# EAGLE board Thing_Plus_Qwiic_Shield-Panel (EAGLE 9.1.0)
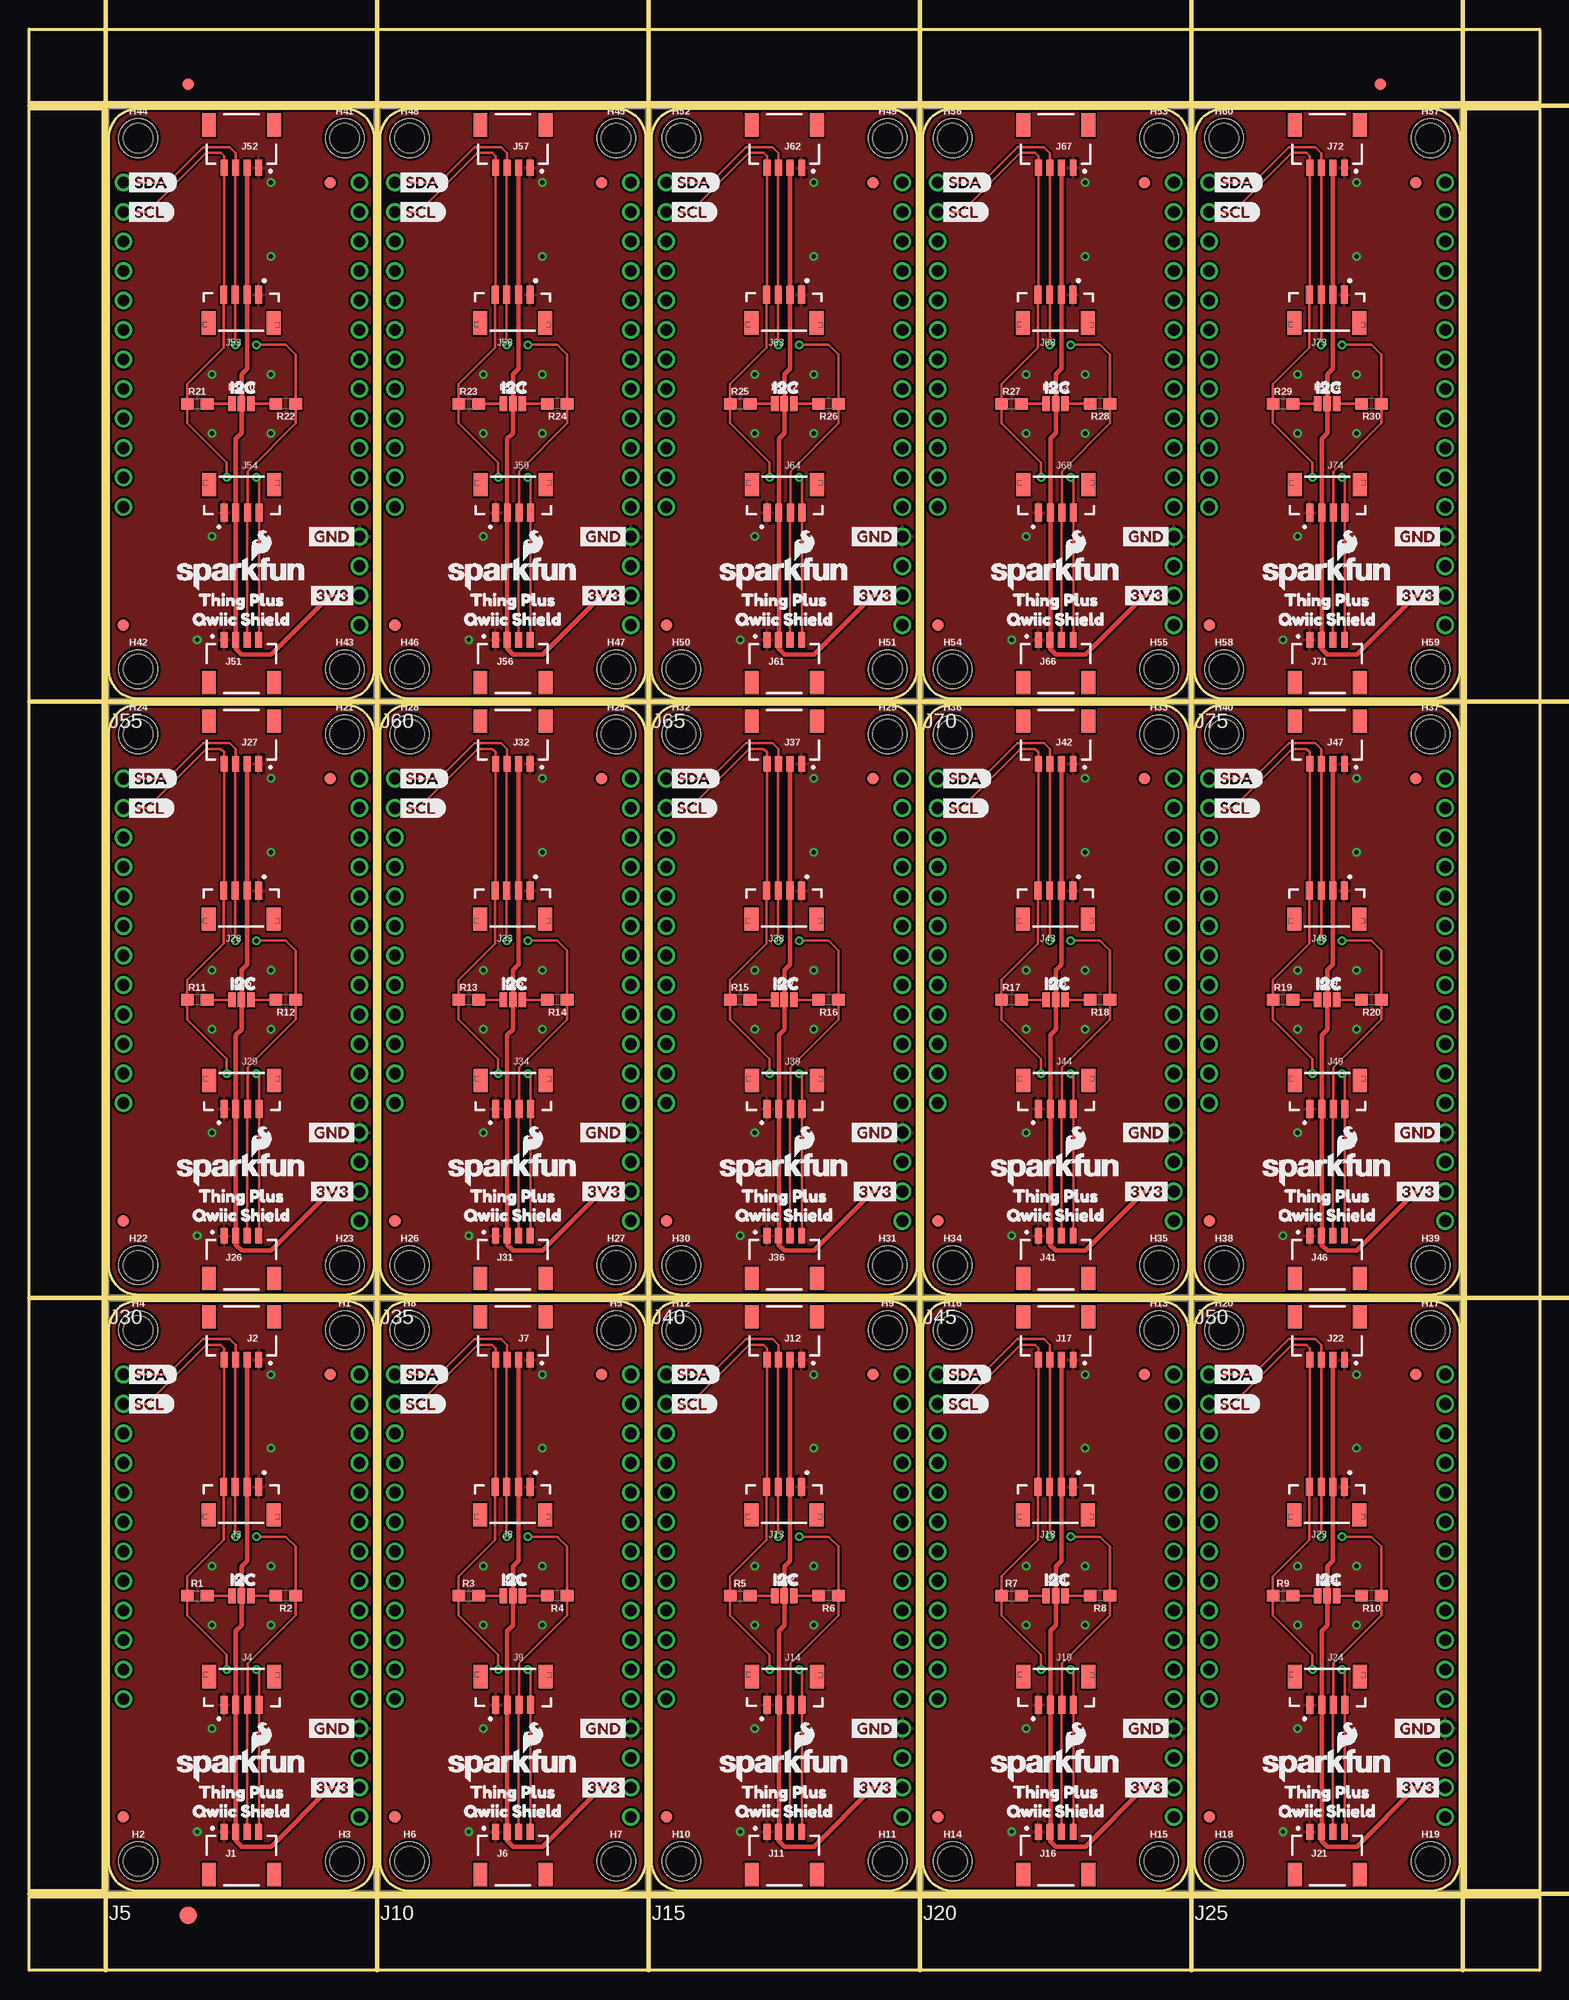
[diagram p0: board, top side]
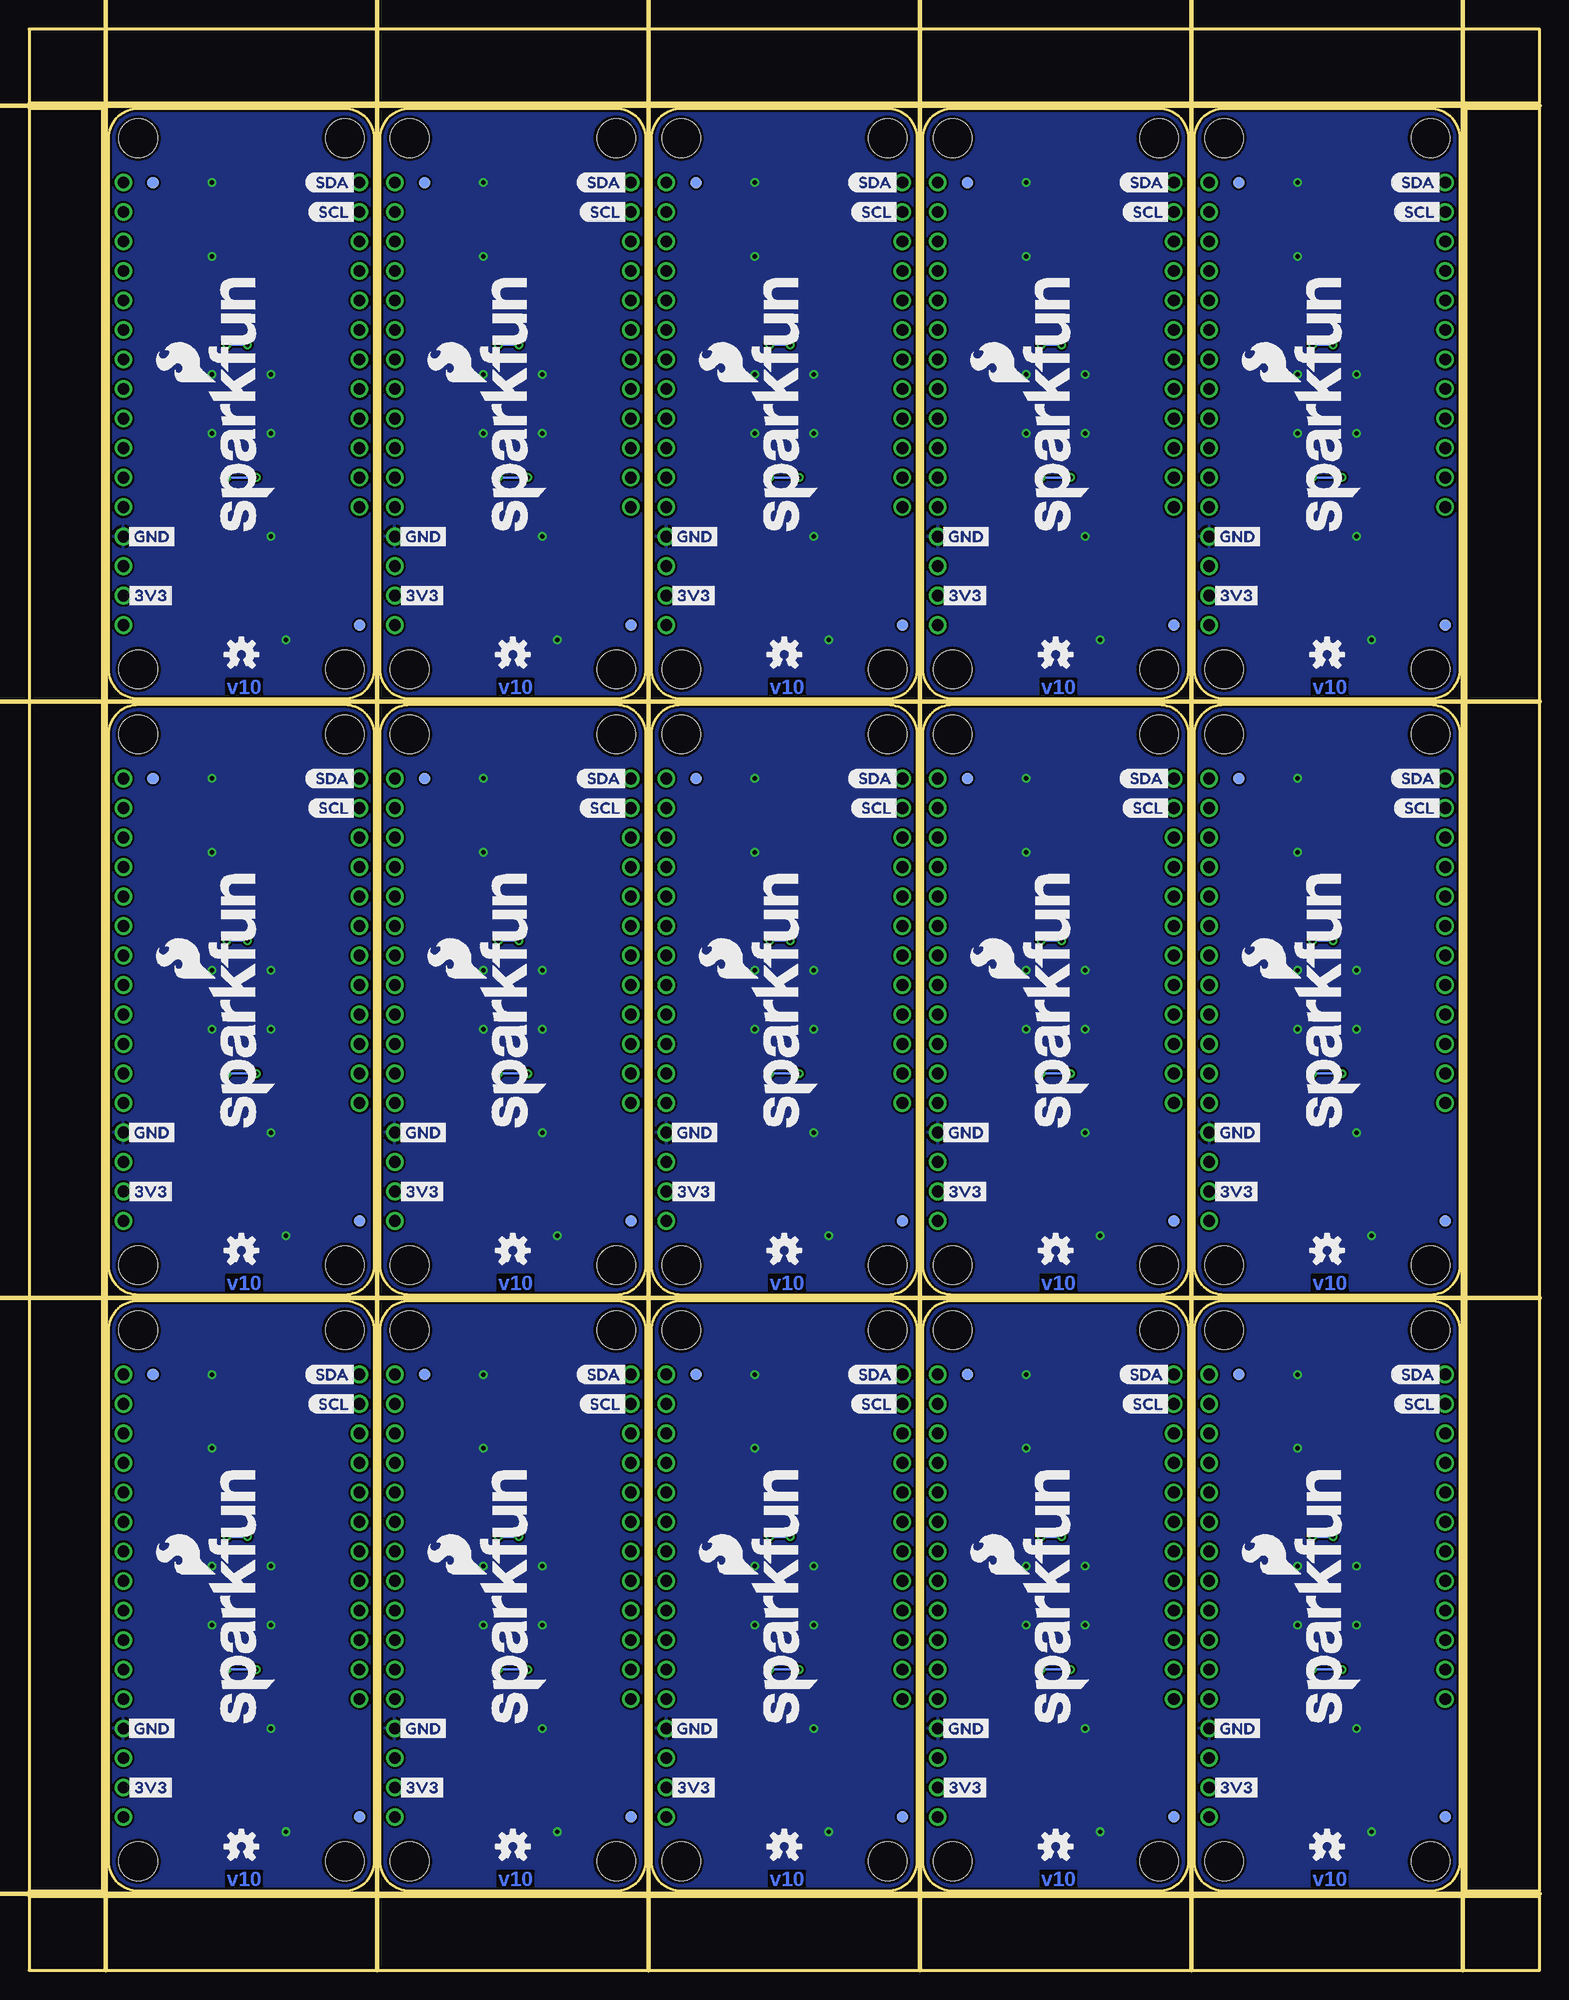
[diagram p1: board, bottom side, seen from below]

Size 130.05 x 167.13 mm. Coordinates in mm from the lower left corner, seen from the top.
Outline: 6.86,9.4 6.86,55.12 arc-90 9.4,57.66 27.18,57.66 arc-90 29.72,55.12 29.72,9.4 arc-90 27.18,6.86 9.4,6.86 arc-90 6.86,9.4
Outline: 30.23,9.4 30.23,55.12 arc-90 32.77,57.66 50.55,57.66 arc-90 53.09,55.12 53.09,9.4 arc-90 50.55,6.86 32.77,6.86 arc-90 30.23,9.4
Outline: 53.59,9.4 53.59,55.12 arc-90 56.13,57.66 73.91,57.66 arc-90 76.45,55.12 76.45,9.4 arc-90 73.91,6.86 56.13,6.86 arc-90 53.59,9.4
Outline: 76.96,9.4 76.96,55.12 arc-90 79.5,57.66 97.28,57.66 arc-90 99.82,55.12 99.82,9.4 arc-90 97.28,6.86 79.5,6.86 arc-90 76.96,9.4
Outline: 100.33,9.4 100.33,55.12 arc-90 102.87,57.66 120.65,57.66 arc-90 123.19,55.12 123.19,9.4 arc-90 120.65,6.86 102.87,6.86 arc-90 100.33,9.4
Outline: 6.86,60.71 6.86,106.43 arc-90 9.4,108.97 27.18,108.97 arc-90 29.72,106.43 29.72,60.71 arc-90 27.18,58.17 9.4,58.17 arc-90 6.86,60.71
Outline: 30.23,60.71 30.23,106.43 arc-90 32.77,108.97 50.55,108.97 arc-90 53.09,106.43 53.09,60.71 arc-90 50.55,58.17 32.77,58.17 arc-90 30.23,60.71
Outline: 53.59,60.71 53.59,106.43 arc-90 56.13,108.97 73.91,108.97 arc-90 76.45,106.43 76.45,60.71 arc-90 73.91,58.17 56.13,58.17 arc-90 53.59,60.71
Outline: 76.96,60.71 76.96,106.43 arc-90 79.5,108.97 97.28,108.97 arc-90 99.82,106.43 99.82,60.71 arc-90 97.28,58.17 79.5,58.17 arc-90 76.96,60.71
Outline: 100.33,60.71 100.33,106.43 arc-90 102.87,108.97 120.65,108.97 arc-90 123.19,106.43 123.19,60.71 arc-90 120.65,58.17 102.87,58.17 arc-90 100.33,60.71
Outline: 6.86,112.01 6.86,157.73 arc-90 9.4,160.27 27.18,160.27 arc-90 29.72,157.73 29.72,112.01 arc-90 27.18,109.47 9.4,109.47 arc-90 6.86,112.01
Outline: 30.23,112.01 30.23,157.73 arc-90 32.77,160.27 50.55,160.27 arc-90 53.09,157.73 53.09,112.01 arc-90 50.55,109.47 32.77,109.47 arc-90 30.23,112.01
Outline: 53.59,112.01 53.59,157.73 arc-90 56.13,160.27 73.91,160.27 arc-90 76.45,157.73 76.45,112.01 arc-90 73.91,109.47 56.13,109.47 arc-90 53.59,112.01
Outline: 76.96,112.01 76.96,157.73 arc-90 79.5,160.27 97.28,160.27 arc-90 99.82,157.73 99.82,112.01 arc-90 97.28,109.47 79.5,109.47 arc-90 76.96,112.01
Outline: 100.33,112.01 100.33,157.73 arc-90 102.87,160.27 120.65,160.27 arc-90 123.19,157.73 123.19,112.01 arc-90 120.65,109.47 102.87,109.47 arc-90 100.33,112.01
Outline: 0,6.35 130.05,6.35 130.05,0 0,0 0,6.35
Outline: 123.7,160.27 130.05,160.27 130.05,6.86 123.7,6.86 123.7,160.27
Outline: 0,167.13 130.05,167.13 130.05,160.78 0,160.78 0,167.13
Outline: 0,160.27 6.35,160.27 6.35,6.86 0,6.86 0,160.27
Copper layers (1*16): Top 0.035mm / dielectric 1.5mm / Bottom 0.035mm
Design rules "SparkFun-2-layer-TIGHT": minimum track width 7mil, minimum drill 15mil, track to track 7mil, track to pad 7mil, pad to pad 7mil, via to via 7mil, smd to smd 7mil, copper to edge 7mil, drill to drill 7mil, minimum pad ring 7mil, minimum via ring 7mil, stop-mask expansion 4mil, vias tented up to drill 25mil, thermal gap 10mil
Milling: 10 lines

## Footprints (pad centres in the part's own frame; a part is rotated, then mirrored left to right if it is on the bottom)
FIDUCIAL-1X2 = smd 1 x 1: 1 0,0
FIDUCIAL-1.5X3 = smd 1.5 x 1.5: 1 0,0
STAND-OFF = hole 3.302: 0,0
SMT-JUMPER_3_NO_NO-SILK = smd 0.635 x 1.27: 1 -0.813,0; 2 0,0; 3 0.813,0
JST04_1MM_RA = smd 0.6 x 1.35: 1 -1.5,0; 2 -0.5,0; 3 0.5,0; 4 1.5,0 | smd 1.2 x 2: NC1 2.8,-3.675; NC2 -2.8,-3.675
JST04_1MM_VERT = smd 0.6 x 1.55: 1 -1.478,0.775; 2 -0.478,0.775; 3 0.522,0.775; 4 1.522,0.775 | smd 1.2 x 2: NC1 -2.778,3.2; NC2 2.822,3.2
THING_PLUS = drill 1.016: 1 -10.16,19.05; 2 -10.16,16.51; 3 -10.16,13.97; 4 -10.16,11.43; 5 -10.16,8.89; 6 -10.16,6.35; 7 -10.16,3.81; 8 -10.16,1.27; 9 -10.16,-1.27; 10 -10.16,-3.81; 11 -10.16,-6.35; 12 -10.16,-8.89; 13 10.16,19.05; 14 10.16,16.51; 15 10.16,13.97; 16 10.16,11.43; 17 10.16,8.89; 18 10.16,6.35; 19 10.16,3.81; 20 10.16,1.27; 21 10.16,-1.27; 22 10.16,-3.81; 23 10.16,-6.35; 24 10.16,-8.89; 25 10.16,-11.43; 26 10.16,-13.97; 27 10.16,-16.51; 28 10.16,-19.05
0603 = smd 1.1 x 1: 1 -0.85,0; 2 0.85,0

## Placement (x,y rotation side)
E$1  [FIDUCIAL-1X2]  13.72,162.37 0 top
E$2  [FIDUCIAL-1X2]  116.33,162.37 0 top
E$3  [FIDUCIAL-1.5X3]  13.72,4.76 0 top
FD1  FIDUCIAL1X2  [FIDUCIAL-1X2]  8.13,13.21 0 top
FD2  FIDUCIAL1X2  [FIDUCIAL-1X2]  8.13,13.21 0 bottom
FD3  FIDUCIAL1X2  [FIDUCIAL-1X2]  25.91,51.31 0 top
FD4  FIDUCIAL1X2  [FIDUCIAL-1X2]  25.91,51.31 0 bottom
FD5  FIDUCIAL1X2  [FIDUCIAL-1X2]  31.5,13.21 0 top
FD6  FIDUCIAL1X2  [FIDUCIAL-1X2]  31.5,13.21 0 bottom
FD7  FIDUCIAL1X2  [FIDUCIAL-1X2]  49.28,51.31 0 top
FD8  FIDUCIAL1X2  [FIDUCIAL-1X2]  49.28,51.31 0 bottom
FD9  FIDUCIAL1X2  [FIDUCIAL-1X2]  54.86,13.21 0 top
FD10  FIDUCIAL1X2  [FIDUCIAL-1X2]  54.86,13.21 0 bottom
FD11  FIDUCIAL1X2  [FIDUCIAL-1X2]  72.64,51.31 0 top
FD12  FIDUCIAL1X2  [FIDUCIAL-1X2]  72.64,51.31 0 bottom
FD13  FIDUCIAL1X2  [FIDUCIAL-1X2]  78.23,13.21 0 top
FD14  FIDUCIAL1X2  [FIDUCIAL-1X2]  78.23,13.21 0 bottom
FD15  FIDUCIAL1X2  [FIDUCIAL-1X2]  96.01,51.31 0 top
FD16  FIDUCIAL1X2  [FIDUCIAL-1X2]  96.01,51.31 0 bottom
FD17  FIDUCIAL1X2  [FIDUCIAL-1X2]  101.6,13.21 0 top
FD18  FIDUCIAL1X2  [FIDUCIAL-1X2]  101.6,13.21 0 bottom
FD19  FIDUCIAL1X2  [FIDUCIAL-1X2]  119.38,51.31 0 top
FD20  FIDUCIAL1X2  [FIDUCIAL-1X2]  119.38,51.31 0 bottom
FD21  FIDUCIAL1X2  [FIDUCIAL-1X2]  8.13,64.52 0 top
FD22  FIDUCIAL1X2  [FIDUCIAL-1X2]  8.13,64.52 0 bottom
FD23  FIDUCIAL1X2  [FIDUCIAL-1X2]  25.91,102.62 0 top
FD24  FIDUCIAL1X2  [FIDUCIAL-1X2]  25.91,102.62 0 bottom
FD25  FIDUCIAL1X2  [FIDUCIAL-1X2]  31.5,64.52 0 top
FD26  FIDUCIAL1X2  [FIDUCIAL-1X2]  31.5,64.52 0 bottom
FD27  FIDUCIAL1X2  [FIDUCIAL-1X2]  49.28,102.62 0 top
FD28  FIDUCIAL1X2  [FIDUCIAL-1X2]  49.28,102.62 0 bottom
FD29  FIDUCIAL1X2  [FIDUCIAL-1X2]  54.86,64.52 0 top
FD30  FIDUCIAL1X2  [FIDUCIAL-1X2]  54.86,64.52 0 bottom
FD31  FIDUCIAL1X2  [FIDUCIAL-1X2]  72.64,102.62 0 top
FD32  FIDUCIAL1X2  [FIDUCIAL-1X2]  72.64,102.62 0 bottom
FD33  FIDUCIAL1X2  [FIDUCIAL-1X2]  78.23,64.52 0 top
FD34  FIDUCIAL1X2  [FIDUCIAL-1X2]  78.23,64.52 0 bottom
FD35  FIDUCIAL1X2  [FIDUCIAL-1X2]  96.01,102.62 0 top
FD36  FIDUCIAL1X2  [FIDUCIAL-1X2]  96.01,102.62 0 bottom
FD37  FIDUCIAL1X2  [FIDUCIAL-1X2]  101.6,64.52 0 top
FD38  FIDUCIAL1X2  [FIDUCIAL-1X2]  101.6,64.52 0 bottom
FD39  FIDUCIAL1X2  [FIDUCIAL-1X2]  119.38,102.62 0 top
FD40  FIDUCIAL1X2  [FIDUCIAL-1X2]  119.38,102.62 0 bottom
FD41  FIDUCIAL1X2  [FIDUCIAL-1X2]  8.13,115.82 0 top
FD42  FIDUCIAL1X2  [FIDUCIAL-1X2]  8.13,115.82 0 bottom
FD43  FIDUCIAL1X2  [FIDUCIAL-1X2]  25.91,153.92 0 top
FD44  FIDUCIAL1X2  [FIDUCIAL-1X2]  25.91,153.92 0 bottom
FD45  FIDUCIAL1X2  [FIDUCIAL-1X2]  31.5,115.82 0 top
FD46  FIDUCIAL1X2  [FIDUCIAL-1X2]  31.5,115.82 0 bottom
FD47  FIDUCIAL1X2  [FIDUCIAL-1X2]  49.28,153.92 0 top
FD48  FIDUCIAL1X2  [FIDUCIAL-1X2]  49.28,153.92 0 bottom
FD49  FIDUCIAL1X2  [FIDUCIAL-1X2]  54.86,115.82 0 top
FD50  FIDUCIAL1X2  [FIDUCIAL-1X2]  54.86,115.82 0 bottom
FD51  FIDUCIAL1X2  [FIDUCIAL-1X2]  72.64,153.92 0 top
FD52  FIDUCIAL1X2  [FIDUCIAL-1X2]  72.64,153.92 0 bottom
FD53  FIDUCIAL1X2  [FIDUCIAL-1X2]  78.23,115.82 0 top
FD54  FIDUCIAL1X2  [FIDUCIAL-1X2]  78.23,115.82 0 bottom
FD55  FIDUCIAL1X2  [FIDUCIAL-1X2]  96.01,153.92 0 top
FD56  FIDUCIAL1X2  [FIDUCIAL-1X2]  96.01,153.92 0 bottom
FD57  FIDUCIAL1X2  [FIDUCIAL-1X2]  101.6,115.82 0 top
FD58  FIDUCIAL1X2  [FIDUCIAL-1X2]  101.6,115.82 0 bottom
FD59  FIDUCIAL1X2  [FIDUCIAL-1X2]  119.38,153.92 0 top
FD60  FIDUCIAL1X2  [FIDUCIAL-1X2]  119.38,153.92 0 bottom
H1  STAND-OFF  [STAND-OFF]  27.18,55.12 0 top
H2  STAND-OFF  [STAND-OFF]  9.4,9.4 0 top
H3  STAND-OFF  [STAND-OFF]  27.18,9.4 0 top
H4  STAND-OFF  [STAND-OFF]  9.4,55.12 0 top
H5  STAND-OFF  [STAND-OFF]  50.55,55.12 0 top
H6  STAND-OFF  [STAND-OFF]  32.77,9.4 0 top
H7  STAND-OFF  [STAND-OFF]  50.55,9.4 0 top
H8  STAND-OFF  [STAND-OFF]  32.77,55.12 0 top
H9  STAND-OFF  [STAND-OFF]  73.91,55.12 0 top
H10  STAND-OFF  [STAND-OFF]  56.13,9.4 0 top
H11  STAND-OFF  [STAND-OFF]  73.91,9.4 0 top
H12  STAND-OFF  [STAND-OFF]  56.13,55.12 0 top
H13  STAND-OFF  [STAND-OFF]  97.28,55.12 0 top
H14  STAND-OFF  [STAND-OFF]  79.5,9.4 0 top
H15  STAND-OFF  [STAND-OFF]  97.28,9.4 0 top
H16  STAND-OFF  [STAND-OFF]  79.5,55.12 0 top
H17  STAND-OFF  [STAND-OFF]  120.65,55.12 0 top
H18  STAND-OFF  [STAND-OFF]  102.87,9.4 0 top
H19  STAND-OFF  [STAND-OFF]  120.65,9.4 0 top
H20  STAND-OFF  [STAND-OFF]  102.87,55.12 0 top
H21  STAND-OFF  [STAND-OFF]  27.18,106.43 0 top
H22  STAND-OFF  [STAND-OFF]  9.4,60.71 0 top
H23  STAND-OFF  [STAND-OFF]  27.18,60.71 0 top
H24  STAND-OFF  [STAND-OFF]  9.4,106.43 0 top
H25  STAND-OFF  [STAND-OFF]  50.55,106.43 0 top
H26  STAND-OFF  [STAND-OFF]  32.77,60.71 0 top
H27  STAND-OFF  [STAND-OFF]  50.55,60.71 0 top
H28  STAND-OFF  [STAND-OFF]  32.77,106.43 0 top
H29  STAND-OFF  [STAND-OFF]  73.91,106.43 0 top
H30  STAND-OFF  [STAND-OFF]  56.13,60.71 0 top
H31  STAND-OFF  [STAND-OFF]  73.91,60.71 0 top
H32  STAND-OFF  [STAND-OFF]  56.13,106.43 0 top
H33  STAND-OFF  [STAND-OFF]  97.28,106.43 0 top
H34  STAND-OFF  [STAND-OFF]  79.5,60.71 0 top
H35  STAND-OFF  [STAND-OFF]  97.28,60.71 0 top
H36  STAND-OFF  [STAND-OFF]  79.5,106.43 0 top
H37  STAND-OFF  [STAND-OFF]  120.65,106.43 0 top
H38  STAND-OFF  [STAND-OFF]  102.87,60.71 0 top
H39  STAND-OFF  [STAND-OFF]  120.65,60.71 0 top
H40  STAND-OFF  [STAND-OFF]  102.87,106.43 0 top
H41  STAND-OFF  [STAND-OFF]  27.18,157.73 0 top
H42  STAND-OFF  [STAND-OFF]  9.4,112.01 0 top
H43  STAND-OFF  [STAND-OFF]  27.18,112.01 0 top
H44  STAND-OFF  [STAND-OFF]  9.4,157.73 0 top
H45  STAND-OFF  [STAND-OFF]  50.55,157.73 0 top
H46  STAND-OFF  [STAND-OFF]  32.77,112.01 0 top
H47  STAND-OFF  [STAND-OFF]  50.55,112.01 0 top
H48  STAND-OFF  [STAND-OFF]  32.77,157.73 0 top
H49  STAND-OFF  [STAND-OFF]  73.91,157.73 0 top
H50  STAND-OFF  [STAND-OFF]  56.13,112.01 0 top
H51  STAND-OFF  [STAND-OFF]  73.91,112.01 0 top
H52  STAND-OFF  [STAND-OFF]  56.13,157.73 0 top
H53  STAND-OFF  [STAND-OFF]  97.28,157.73 0 top
H54  STAND-OFF  [STAND-OFF]  79.5,112.01 0 top
H55  STAND-OFF  [STAND-OFF]  97.28,112.01 0 top
H56  STAND-OFF  [STAND-OFF]  79.5,157.73 0 top
H57  STAND-OFF  [STAND-OFF]  120.65,157.73 0 top
H58  STAND-OFF  [STAND-OFF]  102.87,112.01 0 top
H59  STAND-OFF  [STAND-OFF]  120.65,112.01 0 top
H60  STAND-OFF  [STAND-OFF]  102.87,157.73 0 top
I2C  JUMPER-SMT_3_NO_NO-SILK  [SMT-JUMPER_3_NO_NO-SILK]  18.29,32.26 0 top
I2C1  JUMPER-SMT_3_NO_NO-SILK  [SMT-JUMPER_3_NO_NO-SILK]  41.66,32.26 0 top
I2C2  JUMPER-SMT_3_NO_NO-SILK  [SMT-JUMPER_3_NO_NO-SILK]  65.02,32.26 0 top
I2C3  JUMPER-SMT_3_NO_NO-SILK  [SMT-JUMPER_3_NO_NO-SILK]  88.39,32.26 0 top
I2C4  JUMPER-SMT_3_NO_NO-SILK  [SMT-JUMPER_3_NO_NO-SILK]  111.76,32.26 0 top
I2C5  JUMPER-SMT_3_NO_NO-SILK  [SMT-JUMPER_3_NO_NO-SILK]  18.29,83.57 0 top
I2C6  JUMPER-SMT_3_NO_NO-SILK  [SMT-JUMPER_3_NO_NO-SILK]  41.66,83.57 0 top
I2C7  JUMPER-SMT_3_NO_NO-SILK  [SMT-JUMPER_3_NO_NO-SILK]  65.02,83.57 0 top
I2C8  JUMPER-SMT_3_NO_NO-SILK  [SMT-JUMPER_3_NO_NO-SILK]  88.39,83.57 0 top
I2C9  JUMPER-SMT_3_NO_NO-SILK  [SMT-JUMPER_3_NO_NO-SILK]  111.76,83.57 0 top
I2C10  JUMPER-SMT_3_NO_NO-SILK  [SMT-JUMPER_3_NO_NO-SILK]  18.29,134.87 0 top
I2C11  JUMPER-SMT_3_NO_NO-SILK  [SMT-JUMPER_3_NO_NO-SILK]  41.66,134.87 0 top
I2C12  JUMPER-SMT_3_NO_NO-SILK  [SMT-JUMPER_3_NO_NO-SILK]  65.02,134.87 0 top
I2C13  JUMPER-SMT_3_NO_NO-SILK  [SMT-JUMPER_3_NO_NO-SILK]  88.39,134.87 0 top
I2C14  JUMPER-SMT_3_NO_NO-SILK  [SMT-JUMPER_3_NO_NO-SILK]  111.76,134.87 0 top
J1  QWIIC_RIGHT_ANGLE  [JST04_1MM_RA]  18.29,11.94 0 top
J2  QWIIC_RIGHT_ANGLE  [JST04_1MM_RA]  18.29,52.58 180 top
J3  Vertical Qwiic Connector  [JST04_1MM_VERT]  18.29,42.42 180 top
J4  Vertical Qwiic Connector  [JST04_1MM_VERT]  18.29,22.1 0 top
J5  THING_PLUS  [THING_PLUS]  18.29,32.26 0 top
J6  QWIIC_RIGHT_ANGLE  [JST04_1MM_RA]  41.66,11.94 0 top
J7  QWIIC_RIGHT_ANGLE  [JST04_1MM_RA]  41.66,52.58 180 top
J8  Vertical Qwiic Connector  [JST04_1MM_VERT]  41.66,42.42 180 top
J9  Vertical Qwiic Connector  [JST04_1MM_VERT]  41.66,22.1 0 top
J10  THING_PLUS  [THING_PLUS]  41.66,32.26 0 top
J11  QWIIC_RIGHT_ANGLE  [JST04_1MM_RA]  65.02,11.94 0 top
J12  QWIIC_RIGHT_ANGLE  [JST04_1MM_RA]  65.02,52.58 180 top
J13  Vertical Qwiic Connector  [JST04_1MM_VERT]  65.02,42.42 180 top
J14  Vertical Qwiic Connector  [JST04_1MM_VERT]  65.02,22.1 0 top
J15  THING_PLUS  [THING_PLUS]  65.02,32.26 0 top
J16  QWIIC_RIGHT_ANGLE  [JST04_1MM_RA]  88.39,11.94 0 top
J17  QWIIC_RIGHT_ANGLE  [JST04_1MM_RA]  88.39,52.58 180 top
J18  Vertical Qwiic Connector  [JST04_1MM_VERT]  88.39,42.42 180 top
J19  Vertical Qwiic Connector  [JST04_1MM_VERT]  88.39,22.1 0 top
J20  THING_PLUS  [THING_PLUS]  88.39,32.26 0 top
J21  QWIIC_RIGHT_ANGLE  [JST04_1MM_RA]  111.76,11.94 0 top
J22  QWIIC_RIGHT_ANGLE  [JST04_1MM_RA]  111.76,52.58 180 top
J23  Vertical Qwiic Connector  [JST04_1MM_VERT]  111.76,42.42 180 top
J24  Vertical Qwiic Connector  [JST04_1MM_VERT]  111.76,22.1 0 top
J25  THING_PLUS  [THING_PLUS]  111.76,32.26 0 top
J26  QWIIC_RIGHT_ANGLE  [JST04_1MM_RA]  18.29,63.25 0 top
J27  QWIIC_RIGHT_ANGLE  [JST04_1MM_RA]  18.29,103.89 180 top
J28  Vertical Qwiic Connector  [JST04_1MM_VERT]  18.29,93.73 180 top
J29  Vertical Qwiic Connector  [JST04_1MM_VERT]  18.29,73.41 0 top
J30  THING_PLUS  [THING_PLUS]  18.29,83.57 0 top
J31  QWIIC_RIGHT_ANGLE  [JST04_1MM_RA]  41.66,63.25 0 top
J32  QWIIC_RIGHT_ANGLE  [JST04_1MM_RA]  41.66,103.89 180 top
J33  Vertical Qwiic Connector  [JST04_1MM_VERT]  41.66,93.73 180 top
J34  Vertical Qwiic Connector  [JST04_1MM_VERT]  41.66,73.41 0 top
J35  THING_PLUS  [THING_PLUS]  41.66,83.57 0 top
J36  QWIIC_RIGHT_ANGLE  [JST04_1MM_RA]  65.02,63.25 0 top
J37  QWIIC_RIGHT_ANGLE  [JST04_1MM_RA]  65.02,103.89 180 top
J38  Vertical Qwiic Connector  [JST04_1MM_VERT]  65.02,93.73 180 top
J39  Vertical Qwiic Connector  [JST04_1MM_VERT]  65.02,73.41 0 top
J40  THING_PLUS  [THING_PLUS]  65.02,83.57 0 top
J41  QWIIC_RIGHT_ANGLE  [JST04_1MM_RA]  88.39,63.25 0 top
J42  QWIIC_RIGHT_ANGLE  [JST04_1MM_RA]  88.39,103.89 180 top
J43  Vertical Qwiic Connector  [JST04_1MM_VERT]  88.39,93.73 180 top
J44  Vertical Qwiic Connector  [JST04_1MM_VERT]  88.39,73.41 0 top
J45  THING_PLUS  [THING_PLUS]  88.39,83.57 0 top
J46  QWIIC_RIGHT_ANGLE  [JST04_1MM_RA]  111.76,63.25 0 top
J47  QWIIC_RIGHT_ANGLE  [JST04_1MM_RA]  111.76,103.89 180 top
J48  Vertical Qwiic Connector  [JST04_1MM_VERT]  111.76,93.73 180 top
J49  Vertical Qwiic Connector  [JST04_1MM_VERT]  111.76,73.41 0 top
J50  THING_PLUS  [THING_PLUS]  111.76,83.57 0 top
J51  QWIIC_RIGHT_ANGLE  [JST04_1MM_RA]  18.29,114.55 0 top
J52  QWIIC_RIGHT_ANGLE  [JST04_1MM_RA]  18.29,155.19 180 top
J53  Vertical Qwiic Connector  [JST04_1MM_VERT]  18.29,145.03 180 top
J54  Vertical Qwiic Connector  [JST04_1MM_VERT]  18.29,124.71 0 top
J55  THING_PLUS  [THING_PLUS]  18.29,134.87 0 top
J56  QWIIC_RIGHT_ANGLE  [JST04_1MM_RA]  41.66,114.55 0 top
J57  QWIIC_RIGHT_ANGLE  [JST04_1MM_RA]  41.66,155.19 180 top
J58  Vertical Qwiic Connector  [JST04_1MM_VERT]  41.66,145.03 180 top
J59  Vertical Qwiic Connector  [JST04_1MM_VERT]  41.66,124.71 0 top
J60  THING_PLUS  [THING_PLUS]  41.66,134.87 0 top
J61  QWIIC_RIGHT_ANGLE  [JST04_1MM_RA]  65.02,114.55 0 top
J62  QWIIC_RIGHT_ANGLE  [JST04_1MM_RA]  65.02,155.19 180 top
J63  Vertical Qwiic Connector  [JST04_1MM_VERT]  65.02,145.03 180 top
J64  Vertical Qwiic Connector  [JST04_1MM_VERT]  65.02,124.71 0 top
J65  THING_PLUS  [THING_PLUS]  65.02,134.87 0 top
J66  QWIIC_RIGHT_ANGLE  [JST04_1MM_RA]  88.39,114.55 0 top
J67  QWIIC_RIGHT_ANGLE  [JST04_1MM_RA]  88.39,155.19 180 top
J68  Vertical Qwiic Connector  [JST04_1MM_VERT]  88.39,145.03 180 top
J69  Vertical Qwiic Connector  [JST04_1MM_VERT]  88.39,124.71 0 top
J70  THING_PLUS  [THING_PLUS]  88.39,134.87 0 top
J71  QWIIC_RIGHT_ANGLE  [JST04_1MM_RA]  111.76,114.55 0 top
J72  QWIIC_RIGHT_ANGLE  [JST04_1MM_RA]  111.76,155.19 180 top
J73  Vertical Qwiic Connector  [JST04_1MM_VERT]  111.76,145.03 180 top
J74  Vertical Qwiic Connector  [JST04_1MM_VERT]  111.76,124.71 0 top
J75  THING_PLUS  [THING_PLUS]  111.76,134.87 0 top
LOGO1  SFE_LOGO_NAME_FLAME.1_INCH  [SFE_LOGO_NAME_FLAME_.1]  18.29,17.65 0 top
LOGO2  SFE_LOGO_NAME_FLAME.2_INCH  [SFE_LOGO_NAME_FLAME_.2]  18.29,32.26 90 bottom
LOGO3  OSHW-LOGOS  [OSHW-LOGO-S]  18.29,10.67 0 bottom
LOGO4  SFE_LOGO_NAME_FLAME.1_INCH  [SFE_LOGO_NAME_FLAME_.1]  41.66,17.65 0 top
LOGO5  SFE_LOGO_NAME_FLAME.2_INCH  [SFE_LOGO_NAME_FLAME_.2]  41.66,32.26 90 bottom
LOGO6  OSHW-LOGOS  [OSHW-LOGO-S]  41.66,10.67 0 bottom
LOGO7  SFE_LOGO_NAME_FLAME.1_INCH  [SFE_LOGO_NAME_FLAME_.1]  65.02,17.65 0 top
LOGO8  SFE_LOGO_NAME_FLAME.2_INCH  [SFE_LOGO_NAME_FLAME_.2]  65.02,32.26 90 bottom
LOGO9  OSHW-LOGOS  [OSHW-LOGO-S]  65.02,10.67 0 bottom
LOGO10  SFE_LOGO_NAME_FLAME.1_INCH  [SFE_LOGO_NAME_FLAME_.1]  88.39,17.65 0 top
LOGO11  SFE_LOGO_NAME_FLAME.2_INCH  [SFE_LOGO_NAME_FLAME_.2]  88.39,32.26 90 bottom
LOGO12  OSHW-LOGOS  [OSHW-LOGO-S]  88.39,10.67 0 bottom
LOGO13  SFE_LOGO_NAME_FLAME.1_INCH  [SFE_LOGO_NAME_FLAME_.1]  111.76,17.65 0 top
LOGO14  SFE_LOGO_NAME_FLAME.2_INCH  [SFE_LOGO_NAME_FLAME_.2]  111.76,32.26 90 bottom
LOGO15  OSHW-LOGOS  [OSHW-LOGO-S]  111.76,10.67 0 bottom
LOGO16  SFE_LOGO_NAME_FLAME.1_INCH  [SFE_LOGO_NAME_FLAME_.1]  18.29,68.96 0 top
LOGO17  SFE_LOGO_NAME_FLAME.2_INCH  [SFE_LOGO_NAME_FLAME_.2]  18.29,83.57 90 bottom
LOGO18  OSHW-LOGOS  [OSHW-LOGO-S]  18.29,61.98 0 bottom
LOGO19  SFE_LOGO_NAME_FLAME.1_INCH  [SFE_LOGO_NAME_FLAME_.1]  41.66,68.96 0 top
LOGO20  SFE_LOGO_NAME_FLAME.2_INCH  [SFE_LOGO_NAME_FLAME_.2]  41.66,83.57 90 bottom
LOGO21  OSHW-LOGOS  [OSHW-LOGO-S]  41.66,61.98 0 bottom
LOGO22  SFE_LOGO_NAME_FLAME.1_INCH  [SFE_LOGO_NAME_FLAME_.1]  65.02,68.96 0 top
LOGO23  SFE_LOGO_NAME_FLAME.2_INCH  [SFE_LOGO_NAME_FLAME_.2]  65.02,83.57 90 bottom
LOGO24  OSHW-LOGOS  [OSHW-LOGO-S]  65.02,61.98 0 bottom
LOGO25  SFE_LOGO_NAME_FLAME.1_INCH  [SFE_LOGO_NAME_FLAME_.1]  88.39,68.96 0 top
LOGO26  SFE_LOGO_NAME_FLAME.2_INCH  [SFE_LOGO_NAME_FLAME_.2]  88.39,83.57 90 bottom
LOGO27  OSHW-LOGOS  [OSHW-LOGO-S]  88.39,61.98 0 bottom
LOGO28  SFE_LOGO_NAME_FLAME.1_INCH  [SFE_LOGO_NAME_FLAME_.1]  111.76,68.96 0 top
LOGO29  SFE_LOGO_NAME_FLAME.2_INCH  [SFE_LOGO_NAME_FLAME_.2]  111.76,83.57 90 bottom
LOGO30  OSHW-LOGOS  [OSHW-LOGO-S]  111.76,61.98 0 bottom
LOGO31  SFE_LOGO_NAME_FLAME.1_INCH  [SFE_LOGO_NAME_FLAME_.1]  18.29,120.27 0 top
LOGO32  SFE_LOGO_NAME_FLAME.2_INCH  [SFE_LOGO_NAME_FLAME_.2]  18.29,134.87 90 bottom
LOGO33  OSHW-LOGOS  [OSHW-LOGO-S]  18.29,113.28 0 bottom
LOGO34  SFE_LOGO_NAME_FLAME.1_INCH  [SFE_LOGO_NAME_FLAME_.1]  41.66,120.27 0 top
LOGO35  SFE_LOGO_NAME_FLAME.2_INCH  [SFE_LOGO_NAME_FLAME_.2]  41.66,134.87 90 bottom
LOGO36  OSHW-LOGOS  [OSHW-LOGO-S]  41.66,113.28 0 bottom
LOGO37  SFE_LOGO_NAME_FLAME.1_INCH  [SFE_LOGO_NAME_FLAME_.1]  65.02,120.27 0 top
LOGO38  SFE_LOGO_NAME_FLAME.2_INCH  [SFE_LOGO_NAME_FLAME_.2]  65.02,134.87 90 bottom
LOGO39  OSHW-LOGOS  [OSHW-LOGO-S]  65.02,113.28 0 bottom
LOGO40  SFE_LOGO_NAME_FLAME.1_INCH  [SFE_LOGO_NAME_FLAME_.1]  88.39,120.27 0 top
LOGO41  SFE_LOGO_NAME_FLAME.2_INCH  [SFE_LOGO_NAME_FLAME_.2]  88.39,134.87 90 bottom
LOGO42  OSHW-LOGOS  [OSHW-LOGO-S]  88.39,113.28 0 bottom
LOGO43  SFE_LOGO_NAME_FLAME.1_INCH  [SFE_LOGO_NAME_FLAME_.1]  111.76,120.27 0 top
LOGO44  SFE_LOGO_NAME_FLAME.2_INCH  [SFE_LOGO_NAME_FLAME_.2]  111.76,134.87 90 bottom
LOGO45  OSHW-LOGOS  [OSHW-LOGO-S]  111.76,113.28 0 bottom
R1  4.7k  [0603]  14.48,32.26 0 top
R2  4.7k  [0603]  22.1,32.26 180 top
R3  4.7k  [0603]  37.85,32.26 0 top
R4  4.7k  [0603]  45.47,32.26 180 top
R5  4.7k  [0603]  61.21,32.26 0 top
R6  4.7k  [0603]  68.83,32.26 180 top
R7  4.7k  [0603]  84.58,32.26 0 top
R8  4.7k  [0603]  92.2,32.26 180 top
R9  4.7k  [0603]  107.95,32.26 0 top
R10  4.7k  [0603]  115.57,32.26 180 top
R11  4.7k  [0603]  14.48,83.57 0 top
R12  4.7k  [0603]  22.1,83.57 180 top
R13  4.7k  [0603]  37.85,83.57 0 top
R14  4.7k  [0603]  45.47,83.57 180 top
R15  4.7k  [0603]  61.21,83.57 0 top
R16  4.7k  [0603]  68.83,83.57 180 top
R17  4.7k  [0603]  84.58,83.57 0 top
R18  4.7k  [0603]  92.2,83.57 180 top
R19  4.7k  [0603]  107.95,83.57 0 top
R20  4.7k  [0603]  115.57,83.57 180 top
R21  4.7k  [0603]  14.48,134.87 0 top
R22  4.7k  [0603]  22.1,134.87 180 top
R23  4.7k  [0603]  37.85,134.87 0 top
R24  4.7k  [0603]  45.47,134.87 180 top
R25  4.7k  [0603]  61.21,134.87 0 top
R26  4.7k  [0603]  68.83,134.87 180 top
R27  4.7k  [0603]  84.58,134.87 0 top
R28  4.7k  [0603]  92.2,134.87 180 top
R29  4.7k  [0603]  107.95,134.87 0 top
R30  4.7k  [0603]  115.57,134.87 180 top
U$1  [THING_PLUS0]  13.72,15.37 0 top
U$2  [_QWIIC_SHIELD1]  12.83,13.72 0 top
U$3  [3V36]  6.86,6.86 0 top
U$4  [3V36]  23.75,15.75 0 top
U$5  [3V36]  28.45,15.75 0 bottom
U$6  [GND0]  23.62,20.83 0 top
U$7  [GND0]  28.45,20.83 0 bottom
U$8  [I2C5]  16.38,33.66 0 top
U$9  [SCL1]  8.13,48.77 0 top
U$10  [SCL3]  12.57,48.77 0 bottom
U$11  [SDA0]  8.13,51.31 0 top
U$12  [SDA2]  12.83,51.31 0 bottom
U$13  [THING_PLUS0]  37.08,15.37 0 top
U$14  [_QWIIC_SHIELD1]  36.2,13.72 0 top
U$15  [3V36]  30.23,6.86 0 top
U$16  [3V36]  47.12,15.75 0 top
U$17  [3V36]  51.82,15.75 0 bottom
U$18  [GND0]  46.99,20.83 0 top
U$19  [GND0]  51.82,20.83 0 bottom
U$20  [I2C5]  39.75,33.66 0 top
U$21  [SCL1]  31.5,48.77 0 top
U$22  [SCL3]  35.94,48.77 0 bottom
U$23  [SDA0]  31.5,51.31 0 top
U$24  [SDA2]  36.2,51.31 0 bottom
U$25  [THING_PLUS0]  60.45,15.37 0 top
U$26  [_QWIIC_SHIELD1]  59.56,13.72 0 top
U$27  [3V36]  53.59,6.86 0 top
U$28  [3V36]  70.48,15.75 0 top
U$29  [3V36]  75.18,15.75 0 bottom
U$30  [GND0]  70.36,20.83 0 top
U$31  [GND0]  75.18,20.83 0 bottom
U$32  [I2C5]  63.12,33.66 0 top
U$33  [SCL1]  54.86,48.77 0 top
U$34  [SCL3]  59.31,48.77 0 bottom
U$35  [SDA0]  54.86,51.31 0 top
U$36  [SDA2]  59.56,51.31 0 bottom
U$37  [THING_PLUS0]  83.82,15.37 0 top
U$38  [_QWIIC_SHIELD1]  82.93,13.72 0 top
U$39  [3V36]  76.96,6.86 0 top
U$40  [3V36]  93.85,15.75 0 top
U$41  [3V36]  98.55,15.75 0 bottom
U$42  [GND0]  93.73,20.83 0 top
U$43  [GND0]  98.55,20.83 0 bottom
U$44  [I2C5]  86.49,33.66 0 top
U$45  [SCL1]  78.23,48.77 0 top
U$46  [SCL3]  82.68,48.77 0 bottom
U$47  [SDA0]  78.23,51.31 0 top
U$48  [SDA2]  82.93,51.31 0 bottom
U$49  [THING_PLUS0]  107.19,15.37 0 top
U$50  [_QWIIC_SHIELD1]  106.3,13.72 0 top
U$51  [3V36]  100.33,6.86 0 top
U$52  [3V36]  117.22,15.75 0 top
U$53  [3V36]  121.92,15.75 0 bottom
U$54  [GND0]  117.09,20.83 0 top
U$55  [GND0]  121.92,20.83 0 bottom
U$56  [I2C5]  109.86,33.66 0 top
U$57  [SCL1]  101.6,48.77 0 top
U$58  [SCL3]  106.05,48.77 0 bottom
U$59  [SDA0]  101.6,51.31 0 top
U$60  [SDA2]  106.3,51.31 0 bottom
U$61  [THING_PLUS0]  13.72,66.67 0 top
U$62  [_QWIIC_SHIELD1]  12.83,65.02 0 top
U$63  [3V36]  6.86,58.17 0 top
U$64  [3V36]  23.75,67.06 0 top
U$65  [3V36]  28.45,67.06 0 bottom
U$66  [GND0]  23.62,72.14 0 top
U$67  [GND0]  28.45,72.14 0 bottom
U$68  [I2C5]  16.38,84.96 0 top
U$69  [SCL1]  8.13,100.08 0 top
U$70  [SCL3]  12.57,100.08 0 bottom
U$71  [SDA0]  8.13,102.62 0 top
U$72  [SDA2]  12.83,102.62 0 bottom
U$73  [THING_PLUS0]  37.08,66.67 0 top
U$74  [_QWIIC_SHIELD1]  36.2,65.02 0 top
U$75  [3V36]  30.23,58.17 0 top
U$76  [3V36]  47.12,67.06 0 top
U$77  [3V36]  51.82,67.06 0 bottom
U$78  [GND0]  46.99,72.14 0 top
U$79  [GND0]  51.82,72.14 0 bottom
U$80  [I2C5]  39.75,84.96 0 top
U$81  [SCL1]  31.5,100.08 0 top
U$82  [SCL3]  35.94,100.08 0 bottom
U$83  [SDA0]  31.5,102.62 0 top
U$84  [SDA2]  36.2,102.62 0 bottom
U$85  [THING_PLUS0]  60.45,66.67 0 top
U$86  [_QWIIC_SHIELD1]  59.56,65.02 0 top
U$87  [3V36]  53.59,58.17 0 top
U$88  [3V36]  70.48,67.06 0 top
U$89  [3V36]  75.18,67.06 0 bottom
U$90  [GND0]  70.36,72.14 0 top
U$91  [GND0]  75.18,72.14 0 bottom
U$92  [I2C5]  63.12,84.96 0 top
U$93  [SCL1]  54.86,100.08 0 top
U$94  [SCL3]  59.31,100.08 0 bottom
U$95  [SDA0]  54.86,102.62 0 top
U$96  [SDA2]  59.56,102.62 0 bottom
U$97  [THING_PLUS0]  83.82,66.67 0 top
U$98  [_QWIIC_SHIELD1]  82.93,65.02 0 top
U$99  [3V36]  76.96,58.17 0 top
U$100  [3V36]  93.85,67.06 0 top
U$101  [3V36]  98.55,67.06 0 bottom
U$102  [GND0]  93.73,72.14 0 top
U$103  [GND0]  98.55,72.14 0 bottom
U$104  [I2C5]  86.49,84.96 0 top
U$105  [SCL1]  78.23,100.08 0 top
U$106  [SCL3]  82.68,100.08 0 bottom
U$107  [SDA0]  78.23,102.62 0 top
U$108  [SDA2]  82.93,102.62 0 bottom
U$109  [THING_PLUS0]  107.19,66.67 0 top
U$110  [_QWIIC_SHIELD1]  106.3,65.02 0 top
U$111  [3V36]  100.33,58.17 0 top
U$112  [3V36]  117.22,67.06 0 top
U$113  [3V36]  121.92,67.06 0 bottom
U$114  [GND0]  117.09,72.14 0 top
U$115  [GND0]  121.92,72.14 0 bottom
U$116  [I2C5]  109.86,84.96 0 top
U$117  [SCL1]  101.6,100.08 0 top
U$118  [SCL3]  106.05,100.08 0 bottom
U$119  [SDA0]  101.6,102.62 0 top
U$120  [SDA2]  106.3,102.62 0 bottom
U$121  [THING_PLUS0]  13.72,117.98 0 top
U$122  [_QWIIC_SHIELD1]  12.83,116.33 0 top
U$123  [3V36]  6.86,109.47 0 top
U$124  [3V36]  23.75,118.36 0 top
U$125  [3V36]  28.45,118.36 0 bottom
U$126  [GND0]  23.62,123.44 0 top
U$127  [GND0]  28.45,123.44 0 bottom
U$128  [I2C5]  16.38,136.27 0 top
U$129  [SCL1]  8.13,151.38 0 top
U$130  [SCL3]  12.57,151.38 0 bottom
U$131  [SDA0]  8.13,153.92 0 top
U$132  [SDA2]  12.83,153.92 0 bottom
U$133  [THING_PLUS0]  37.08,117.98 0 top
U$134  [_QWIIC_SHIELD1]  36.2,116.33 0 top
U$135  [3V36]  30.23,109.47 0 top
U$136  [3V36]  47.12,118.36 0 top
U$137  [3V36]  51.82,118.36 0 bottom
U$138  [GND0]  46.99,123.44 0 top
U$139  [GND0]  51.82,123.44 0 bottom
U$140  [I2C5]  39.75,136.27 0 top
U$141  [SCL1]  31.5,151.38 0 top
U$142  [SCL3]  35.94,151.38 0 bottom
U$143  [SDA0]  31.5,153.92 0 top
U$144  [SDA2]  36.2,153.92 0 bottom
U$145  [THING_PLUS0]  60.45,117.98 0 top
U$146  [_QWIIC_SHIELD1]  59.56,116.33 0 top
U$147  [3V36]  53.59,109.47 0 top
U$148  [3V36]  70.48,118.36 0 top
U$149  [3V36]  75.18,118.36 0 bottom
U$150  [GND0]  70.36,123.44 0 top
U$151  [GND0]  75.18,123.44 0 bottom
U$152  [I2C5]  63.12,136.27 0 top
U$153  [SCL1]  54.86,151.38 0 top
U$154  [SCL3]  59.31,151.38 0 bottom
U$155  [SDA0]  54.86,153.92 0 top
U$156  [SDA2]  59.56,153.92 0 bottom
U$157  [THING_PLUS0]  83.82,117.98 0 top
U$158  [_QWIIC_SHIELD1]  82.93,116.33 0 top
U$159  [3V36]  76.96,109.47 0 top
U$160  [3V36]  93.85,118.36 0 top
U$161  [3V36]  98.55,118.36 0 bottom
U$162  [GND0]  93.73,123.44 0 top
U$163  [GND0]  98.55,123.44 0 bottom
U$164  [I2C5]  86.49,136.27 0 top
U$165  [SCL1]  78.23,151.38 0 top
U$166  [SCL3]  82.68,151.38 0 bottom
U$167  [SDA0]  78.23,153.92 0 top
U$168  [SDA2]  82.93,153.92 0 bottom
U$169  [THING_PLUS0]  107.19,117.98 0 top
U$170  [_QWIIC_SHIELD1]  106.3,116.33 0 top
U$171  [3V36]  100.33,109.47 0 top
U$172  [3V36]  117.22,118.36 0 top
U$173  [3V36]  121.92,118.36 0 bottom
U$174  [GND0]  117.09,123.44 0 top
U$175  [GND0]  121.92,123.44 0 bottom
U$176  [I2C5]  109.86,136.27 0 top
U$177  [SCL1]  101.6,151.38 0 top
U$178  [SCL3]  106.05,151.38 0 bottom
U$179  [SDA0]  101.6,153.92 0 top
U$180  [SDA2]  106.3,153.92 0 bottom

## Library data of the parts
E$1 E$2 FD1-FD60 LOGO1-LOGO45 = SparkFun-Aesthetics
E$3 = SparkFun-Retired
H1-H60 = SparkFun-Hardware
I2C I2C1-I2C14 = SparkFun-Jumpers
J1 J2 J6 J7 J11 J12 J16 J17 J21 J22 J26 J27 J31 J32 J36 J37 J41 J42 J46 J47 J51 J52 J56 J57 J61 J62 J66 J67 J71 J72 = SparkFun-Connectors; PROD_ID: CONN-13694
J3 J4 J8 J9 J13 J14 J18 J19 J23 J24 J28 J29 J33 J34 J38 J39 J43 J44 J48 J49 J53 J54 J58 J59 J63 J64 J68 J69 J73 J74 = SparkFun-Connectors; PROD_ID: CONN-14483
J5 J10 J15 J20 J25 J30 J35 J40 J45 J50 J55 J60 J65 J70 J75 = SparkFun-Boards
R1-R30 = SparkFun-Resistors; PROD_ID: RES-07857
U$1 U$2 U$13 U$14 U$25 U$26 U$37 U$38 U$49 U$50 U$61 U$62 U$73 U$74 U$85 U$86 U$97 U$98 U$109 U$110 U$121 U$122 U$133 U$134 U$145 U$146 U$157 U$158 U$169 U$170 = buzzard_labels (25)
U$3 U$15 U$27 U$39 U$51 U$63 U$75 U$87 U$99 U$111 U$123 U$135 U$147 U$159 U$171 = buzzard_labels (24)
U$4-U$8 U$16-U$20 U$28-U$32 U$40-U$44 U$52-U$56 U$64-U$68 U$76-U$80 U$88-U$92 U$100-U$104 U$112-U$116 U$124-U$128 U$136-U$140 U$148-U$152 U$160-U$164 U$172-U$176 = buzzard_labels (23)
U$9-U$12 U$21-U$24 U$33-U$36 U$45-U$48 U$57-U$60 U$69-U$72 U$81-U$84 U$93-U$96 U$105-U$108 U$117-U$120 U$129-U$132 U$141-U$144 U$153-U$156 U$165-U$168 U$177-U$180 = buzzard_labels (26)

## Nets
3.3V: I2C.2 J1.2 J2.2 J3.2 J4.2 J5.27
3.3V1: I2C1.2 J6.2 J7.2 J8.2 J9.2 J10.27
3.3V2: I2C2.2 J11.2 J12.2 J13.2 J14.2 J15.27
3.3V3: I2C3.2 J16.2 J17.2 J18.2 J19.2 J20.27
3.3V4: I2C4.2 J21.2 J22.2 J23.2 J24.2 J25.27
3.3V5: I2C5.2 J26.2 J27.2 J28.2 J29.2 J30.27
3.3V6: I2C6.2 J31.2 J32.2 J33.2 J34.2 J35.27
3.3V7: I2C7.2 J36.2 J37.2 J38.2 J39.2 J40.27
3.3V8: I2C8.2 J41.2 J42.2 J43.2 J44.2 J45.27
3.3V9: I2C9.2 J46.2 J47.2 J48.2 J49.2 J50.27
3.3V10: I2C10.2 J51.2 J52.2 J53.2 J54.2 J55.27
3.3V11: I2C11.2 J56.2 J57.2 J58.2 J59.2 J60.27
3.3V12: I2C12.2 J61.2 J62.2 J63.2 J64.2 J65.27
3.3V13: I2C13.2 J66.2 J67.2 J68.2 J69.2 J70.27
3.3V14: I2C14.2 J71.2 J72.2 J73.2 J74.2 J75.27
GND: J1.1 J2.1 J3.1 J4.1 J5.25
GND1: J6.1 J7.1 J8.1 J9.1 J10.25
GND2: J11.1 J12.1 J13.1 J14.1 J15.25
GND3: J16.1 J17.1 J18.1 J19.1 J20.25
GND4: J21.1 J22.1 J23.1 J24.1 J25.25
GND5: J26.1 J27.1 J28.1 J29.1 J30.25
GND6: J31.1 J32.1 J33.1 J34.1 J35.25
GND7: J36.1 J37.1 J38.1 J39.1 J40.25
GND8: J41.1 J42.1 J43.1 J44.1 J45.25
GND9: J46.1 J47.1 J48.1 J49.1 J50.25
GND10: J51.1 J52.1 J53.1 J54.1 J55.25
GND11: J56.1 J57.1 J58.1 J59.1 J60.25
GND12: J61.1 J62.1 J63.1 J64.1 J65.25
GND13: J66.1 J67.1 J68.1 J69.1 J70.25
GND14: J71.1 J72.1 J73.1 J74.1 J75.25
N$1: I2C1.3 R4.2
N$2: I2C1.1 R3.2
N$3: I2C.3 R2.2
N$4: I2C.1 R1.2
N$5: I2C2.3 R6.2
N$6: I2C2.1 R5.2
N$7: I2C3.3 R8.2
N$8: I2C3.1 R7.2
N$9: I2C4.3 R10.2
N$10: I2C4.1 R9.2
N$11: I2C5.3 R12.2
N$12: I2C5.1 R11.2
N$13: I2C6.3 R14.2
N$14: I2C6.1 R13.2
N$15: I2C7.3 R16.2
N$16: I2C7.1 R15.2
N$17: I2C8.3 R18.2
N$18: I2C8.1 R17.2
N$19: I2C9.3 R20.2
N$20: I2C9.1 R19.2
N$21: I2C10.3 R22.2
N$22: I2C10.1 R21.2
N$23: I2C11.3 R24.2
N$24: I2C11.1 R23.2
N$25: I2C12.3 R26.2
N$26: I2C12.1 R25.2
N$27: I2C13.3 R28.2
N$28: I2C13.1 R27.2
N$29: I2C14.3 R30.2
N$30: I2C14.1 R29.2
SCL: J1.4 J2.4 J3.4 J4.4 J5.2 R1.1
SCL1: J6.4 J7.4 J8.4 J9.4 J10.2 R3.1
SCL2: J11.4 J12.4 J13.4 J14.4 J15.2 R5.1
SCL3: J16.4 J17.4 J18.4 J19.4 J20.2 R7.1
SCL4: J21.4 J22.4 J23.4 J24.4 J25.2 R9.1
SCL5: J26.4 J27.4 J28.4 J29.4 J30.2 R11.1
SCL6: J31.4 J32.4 J33.4 J34.4 J35.2 R13.1
SCL7: J36.4 J37.4 J38.4 J39.4 J40.2 R15.1
SCL8: J41.4 J42.4 J43.4 J44.4 J45.2 R17.1
SCL9: J46.4 J47.4 J48.4 J49.4 J50.2 R19.1
SCL10: J51.4 J52.4 J53.4 J54.4 J55.2 R21.1
SCL11: J56.4 J57.4 J58.4 J59.4 J60.2 R23.1
SCL12: J61.4 J62.4 J63.4 J64.4 J65.2 R25.1
SCL13: J66.4 J67.4 J68.4 J69.4 J70.2 R27.1
SCL14: J71.4 J72.4 J73.4 J74.4 J75.2 R29.1
SDA: J1.3 J2.3 J3.3 J4.3 J5.1 R2.1
SDA1: J6.3 J7.3 J8.3 J9.3 J10.1 R4.1
SDA2: J11.3 J12.3 J13.3 J14.3 J15.1 R6.1
SDA3: J16.3 J17.3 J18.3 J19.3 J20.1 R8.1
SDA4: J21.3 J22.3 J23.3 J24.3 J25.1 R10.1
SDA5: J26.3 J27.3 J28.3 J29.3 J30.1 R12.1
SDA6: J31.3 J32.3 J33.3 J34.3 J35.1 R14.1
SDA7: J36.3 J37.3 J38.3 J39.3 J40.1 R16.1
SDA8: J41.3 J42.3 J43.3 J44.3 J45.1 R18.1
SDA9: J46.3 J47.3 J48.3 J49.3 J50.1 R20.1
SDA10: J51.3 J52.3 J53.3 J54.3 J55.1 R22.1
SDA11: J56.3 J57.3 J58.3 J59.3 J60.1 R24.1
SDA12: J61.3 J62.3 J63.3 J64.3 J65.1 R26.1
SDA13: J66.3 J67.3 J68.3 J69.3 J70.1 R28.1
SDA14: J71.3 J72.3 J73.3 J74.3 J75.1 R30.1

## Tracks (layer width: path | path; a pad name or v marks a point on that pad's centre or on a via)
3.3V
  Top 0.203: J3.2 18.77,42.42 18.79,42.44 | 17.81,11.96 J1.2 17.79,11.17 | J5.27 25.91,15.75
  Top 0.406: 18.77,42.42 18.77,35.28 18.29,34.8 I2C.2 18.29,29.72 17.81,29.24 J4.2 17.81,11.96 | J2.2 18.79,42.44 | 25.91,15.75 20.83,10.67 18.29,10.67 17.79,11.17
3.3V1
  Top 0.203: J8.2 42.13,42.42 42.16,42.44 | 41.18,11.96 J6.2 41.16,11.17 | J10.27 49.28,15.75
  Top 0.406: 42.13,42.42 42.13,35.28 41.66,34.8 I2C1.2 41.66,29.72 41.18,29.24 J9.2 41.18,11.96 | J7.2 42.16,42.44 | 49.28,15.75 44.2,10.67 41.66,10.67 41.16,11.17
3.3V2
  Top 0.203: J13.2 65.5,42.42 65.52,42.44 | 64.55,11.96 J11.2 64.52,11.17 | J15.27 72.64,15.75
  Top 0.406: 65.5,42.42 65.5,35.28 65.02,34.8 I2C2.2 65.02,29.72 64.55,29.24 J14.2 64.55,11.96 | J12.2 65.52,42.44 | 72.64,15.75 67.56,10.67 65.02,10.67 64.52,11.17
3.3V3
  Top 0.203: J18.2 88.87,42.42 88.89,42.44 | 87.91,11.96 J16.2 87.89,11.17 | J20.27 96.01,15.75
  Top 0.406: 88.87,42.42 88.87,35.28 88.39,34.8 I2C3.2 88.39,29.72 87.91,29.24 J19.2 87.91,11.96 | J17.2 88.89,42.44 | 96.01,15.75 90.93,10.67 88.39,10.67 87.89,11.17
3.3V4
  Top 0.203: J23.2 112.24,42.42 112.26,42.44 | 111.28,11.96 J21.2 111.26,11.17 | J25.27 119.38,15.75
  Top 0.406: 112.24,42.42 112.24,35.28 111.76,34.8 I2C4.2 111.76,29.72 111.28,29.24 J24.2 111.28,11.96 | J22.2 112.26,42.44 | 119.38,15.75 114.3,10.67 111.76,10.67 111.26,11.17
3.3V5
  Top 0.203: J28.2 18.77,93.73 18.79,93.75 | 17.81,63.27 J26.2 17.79,62.48 | J30.27 25.91,67.06
  Top 0.406: 18.77,93.73 18.77,86.58 18.29,86.11 I2C5.2 18.29,81.03 17.81,80.55 J29.2 17.81,63.27 | J27.2 18.79,93.75 | 25.91,67.06 20.83,61.98 18.29,61.98 17.79,62.48
3.3V6
  Top 0.203: J33.2 42.13,93.73 42.16,93.75 | 41.18,63.27 J31.2 41.16,62.48 | J35.27 49.28,67.06
  Top 0.406: 42.13,93.73 42.13,86.58 41.66,86.11 I2C6.2 41.66,81.03 41.18,80.55 J34.2 41.18,63.27 | J32.2 42.16,93.75 | 49.28,67.06 44.2,61.98 41.66,61.98 41.16,62.48
3.3V7
  Top 0.203: J38.2 65.5,93.73 65.52,93.75 | 64.55,63.27 J36.2 64.52,62.48 | J40.27 72.64,67.06
  Top 0.406: 65.5,93.73 65.5,86.58 65.02,86.11 I2C7.2 65.02,81.03 64.55,80.55 J39.2 64.55,63.27 | J37.2 65.52,93.75 | 72.64,67.06 67.56,61.98 65.02,61.98 64.52,62.48
3.3V8
  Top 0.203: J43.2 88.87,93.73 88.89,93.75 | 87.91,63.27 J41.2 87.89,62.48 | J45.27 96.01,67.06
  Top 0.406: 88.87,93.73 88.87,86.58 88.39,86.11 I2C8.2 88.39,81.03 87.91,80.55 J44.2 87.91,63.27 | J42.2 88.89,93.75 | 96.01,67.06 90.93,61.98 88.39,61.98 87.89,62.48
3.3V9
  Top 0.203: J48.2 112.24,93.73 112.26,93.75 | 111.28,63.27 J46.2 111.26,62.48 | J50.27 119.38,67.06
  Top 0.406: 112.24,93.73 112.24,86.58 111.76,86.11 I2C9.2 111.76,81.03 111.28,80.55 J49.2 111.28,63.27 | J47.2 112.26,93.75 | 119.38,67.06 114.3,61.98 111.76,61.98 111.26,62.48
3.3V10
  Top 0.203: J53.2 18.77,145.03 18.79,145.06 | 17.81,114.58 J51.2 17.79,113.78 | J55.27 25.91,118.36
  Top 0.406: 18.77,145.03 18.77,137.89 18.29,137.41 I2C10.2 18.29,132.33 17.81,131.86 J54.2 17.81,114.58 | J52.2 18.79,145.06 | 25.91,118.36 20.83,113.28 18.29,113.28 17.79,113.78
3.3V11
  Top 0.203: J58.2 42.13,145.03 42.16,145.06 | 41.18,114.58 J56.2 41.16,113.78 | J60.27 49.28,118.36
  Top 0.406: 42.13,145.03 42.13,137.89 41.66,137.41 I2C11.2 41.66,132.33 41.18,131.86 J59.2 41.18,114.58 | J57.2 42.16,145.06 | 49.28,118.36 44.2,113.28 41.66,113.28 41.16,113.78
3.3V12
  Top 0.203: J63.2 65.5,145.03 65.52,145.06 | 64.55,114.58 J61.2 64.52,113.78 | J65.27 72.64,118.36
  Top 0.406: 65.5,145.03 65.5,137.89 65.02,137.41 I2C12.2 65.02,132.33 64.55,131.86 J64.2 64.55,114.58 | J62.2 65.52,145.06 | 72.64,118.36 67.56,113.28 65.02,113.28 64.52,113.78
3.3V13
  Top 0.203: J68.2 88.87,145.03 88.89,145.06 | 87.91,114.58 J66.2 87.89,113.78 | J70.27 96.01,118.36
  Top 0.406: 88.87,145.03 88.87,137.89 88.39,137.41 I2C13.2 88.39,132.33 87.91,131.86 J69.2 87.91,114.58 | J67.2 88.89,145.06 | 96.01,118.36 90.93,113.28 88.39,113.28 87.89,113.78
3.3V14
  Top 0.203: J73.2 112.24,145.03 112.26,145.06 | 111.28,114.58 J71.2 111.26,113.78 | J75.27 119.38,118.36
  Top 0.406: 112.24,145.03 112.24,137.89 111.76,137.41 I2C14.2 111.76,132.33 111.28,131.86 J74.2 111.28,114.58 | J72.2 112.26,145.06 | 119.38,118.36 114.3,113.28 111.76,113.28 111.26,113.78
GND  (via drill 0.38)
  other vias: 15.75,20.83 14.48,11.94 20.83,44.96 20.83,51.31 15.75,29.72 15.75,34.8 20.83,34.8 20.83,29.72
  pour Top: 6.86,6.86 29.72,6.86 29.72,57.66 6.86,57.66
  pour Bottom: 29.72,6.86 6.86,6.86 6.86,57.66 29.72,57.66
GND1  (via drill 0.38)
  other vias: 39.12,20.83 37.85,11.94 44.2,44.96 44.2,51.31 39.12,29.72 39.12,34.8 44.2,34.8 44.2,29.72
  pour Top: 30.23,6.86 53.09,6.86 53.09,57.66 30.23,57.66
  pour Bottom: 53.09,6.86 30.23,6.86 30.23,57.66 53.09,57.66
GND2  (via drill 0.38)
  other vias: 62.48,20.83 61.21,11.94 67.56,44.96 67.56,51.31 62.48,29.72 62.48,34.8 67.56,34.8 67.56,29.72
  pour Top: 53.59,6.86 76.45,6.86 76.45,57.66 53.59,57.66
  pour Bottom: 76.45,6.86 53.59,6.86 53.59,57.66 76.45,57.66
GND3  (via drill 0.38)
  other vias: 85.85,20.83 84.58,11.94 90.93,44.96 90.93,51.31 85.85,29.72 85.85,34.8 90.93,34.8 90.93,29.72
  pour Top: 76.96,6.86 99.82,6.86 99.82,57.66 76.96,57.66
  pour Bottom: 99.82,6.86 76.96,6.86 76.96,57.66 99.82,57.66
GND4  (via drill 0.38)
  other vias: 109.22,20.83 107.95,11.94 114.3,44.96 114.3,51.31 109.22,29.72 109.22,34.8 114.3,34.8 114.3,29.72
  pour Top: 100.33,6.86 123.19,6.86 123.19,57.66 100.33,57.66
  pour Bottom: 123.19,6.86 100.33,6.86 100.33,57.66 123.19,57.66
GND5  (via drill 0.38)
  other vias: 15.75,72.14 14.48,63.25 20.83,96.27 20.83,102.62 15.75,81.03 15.75,86.11 20.83,86.11 20.83,81.03
  pour Top: 6.86,58.17 29.72,58.17 29.72,108.97 6.86,108.97
  pour Bottom: 29.72,58.17 6.86,58.17 6.86,108.97 29.72,108.97
GND6  (via drill 0.38)
  other vias: 39.12,72.14 37.85,63.25 44.2,96.27 44.2,102.62 39.12,81.03 39.12,86.11 44.2,86.11 44.2,81.03
  pour Top: 30.23,58.17 53.09,58.17 53.09,108.97 30.23,108.97
  pour Bottom: 53.09,58.17 30.23,58.17 30.23,108.97 53.09,108.97
GND7  (via drill 0.38)
  other vias: 62.48,72.14 61.21,63.25 67.56,96.27 67.56,102.62 62.48,81.03 62.48,86.11 67.56,86.11 67.56,81.03
  pour Top: 53.59,58.17 76.45,58.17 76.45,108.97 53.59,108.97
  pour Bottom: 76.45,58.17 53.59,58.17 53.59,108.97 76.45,108.97
GND8  (via drill 0.38)
  other vias: 85.85,72.14 84.58,63.25 90.93,96.27 90.93,102.62 85.85,81.03 85.85,86.11 90.93,86.11 90.93,81.03
  pour Top: 76.96,58.17 99.82,58.17 99.82,108.97 76.96,108.97
  pour Bottom: 99.82,58.17 76.96,58.17 76.96,108.97 99.82,108.97
GND9  (via drill 0.38)
  other vias: 109.22,72.14 107.95,63.25 114.3,96.27 114.3,102.62 109.22,81.03 109.22,86.11 114.3,86.11 114.3,81.03
  pour Top: 100.33,58.17 123.19,58.17 123.19,108.97 100.33,108.97
  pour Bottom: 123.19,58.17 100.33,58.17 100.33,108.97 123.19,108.97
GND10  (via drill 0.38)
  other vias: 15.75,123.44 14.48,114.55 20.83,147.57 20.83,153.92 15.75,132.33 15.75,137.41 20.83,137.41 20.83,132.33
  pour Top: 6.86,109.47 29.72,109.47 29.72,160.27 6.86,160.27
  pour Bottom: 29.72,109.47 6.86,109.47 6.86,160.27 29.72,160.27
GND11  (via drill 0.38)
  other vias: 39.12,123.44 37.85,114.55 44.2,147.57 44.2,153.92 39.12,132.33 39.12,137.41 44.2,137.41 44.2,132.33
  pour Top: 30.23,109.47 53.09,109.47 53.09,160.27 30.23,160.27
  pour Bottom: 53.09,109.47 30.23,109.47 30.23,160.27 53.09,160.27
GND12  (via drill 0.38)
  other vias: 62.48,123.44 61.21,114.55 67.56,147.57 67.56,153.92 62.48,132.33 62.48,137.41 67.56,137.41 67.56,132.33
  pour Top: 53.59,109.47 76.45,109.47 76.45,160.27 53.59,160.27
  pour Bottom: 76.45,109.47 53.59,109.47 53.59,160.27 76.45,160.27
GND13  (via drill 0.38)
  other vias: 85.85,123.44 84.58,114.55 90.93,147.57 90.93,153.92 85.85,132.33 85.85,137.41 90.93,137.41 90.93,132.33
  pour Top: 76.96,109.47 99.82,109.47 99.82,160.27 76.96,160.27
  pour Bottom: 99.82,109.47 76.96,109.47 76.96,160.27 99.82,160.27
GND14  (via drill 0.38)
  other vias: 109.22,123.44 107.95,114.55 114.3,147.57 114.3,153.92 109.22,132.33 109.22,137.41 114.3,137.41 114.3,132.33
  pour Top: 100.33,109.47 123.19,109.47 123.19,160.27 100.33,160.27
  pour Bottom: 123.19,109.47 100.33,109.47 100.33,160.27 123.19,160.27
N$1
  Top 0.203: I2C1.3 R4.2
N$2
  Top 0.203: I2C1.1 R3.2
N$3
  Top 0.203: I2C.3 R2.2
N$4
  Top 0.203: I2C.1 R1.2
N$5
  Top 0.203: I2C2.3 R6.2
N$6
  Top 0.203: I2C2.1 R5.2
N$7
  Top 0.203: I2C3.3 R8.2
N$8
  Top 0.203: I2C3.1 R7.2
N$9
  Top 0.203: I2C4.3 R10.2
N$10
  Top 0.203: I2C4.1 R9.2
N$11
  Top 0.203: I2C5.3 R12.2
N$12
  Top 0.203: I2C5.1 R11.2
N$13
  Top 0.203: I2C6.3 R14.2
N$14
  Top 0.203: I2C6.1 R13.2
N$15
  Top 0.203: I2C7.3 R16.2
N$16
  Top 0.203: I2C7.1 R15.2
N$17
  Top 0.203: I2C8.3 R18.2
N$18
  Top 0.203: I2C8.1 R17.2
N$19
  Top 0.203: I2C9.3 R20.2
N$20
  Top 0.203: I2C9.1 R19.2
N$21
  Top 0.203: I2C10.3 R22.2
N$22
  Top 0.203: I2C10.1 R21.2
N$23
  Top 0.203: I2C11.3 R24.2
N$24
  Top 0.203: I2C11.1 R23.2
N$25
  Top 0.203: I2C12.3 R26.2
N$26
  Top 0.203: I2C12.1 R25.2
N$27
  Top 0.203: I2C13.3 R28.2
N$28
  Top 0.203: I2C13.1 R27.2
N$29
  Top 0.203: I2C14.3 R30.2
N$30
  Top 0.203: I2C14.1 R29.2
SCL  (via drill 0.38)
  Top 0.203: J1.4 19.81,11.96 J4.4 19.81,25.66 v19.56,25.91 | v17.02,25.91 17.02,27.18 13.63,30.57 R1.1 13.63,33.95 16.77,37.09 J3.4 16.79,41.66 16.79,48.77 J2.4 16.79,53.57 16.51,53.85 15.24,53.85 10.16,48.77 J5.2
  Bottom 0.203: v17.02,25.91 v19.56,25.91
SCL1  (via drill 0.38)
  Top 0.203: J6.4 43.18,11.96 J9.4 43.18,25.66 v42.93,25.91 | v40.39,25.91 40.39,27.18 37,30.57 R3.1 37,33.95 40.13,37.09 J8.4 40.16,41.66 40.16,48.77 J7.4 40.16,53.57 39.88,53.85 38.61,53.85 33.53,48.77 J10.2
  Bottom 0.203: v40.39,25.91 v42.93,25.91
SCL2  (via drill 0.38)
  Top 0.203: J11.4 66.55,11.96 J14.4 66.55,25.66 v66.29,25.91 | v63.75,25.91 63.75,27.18 60.36,30.57 R5.1 60.36,33.95 63.5,37.09 J13.4 63.52,41.66 63.52,48.77 J12.4 63.52,53.57 63.25,53.85 61.98,53.85 56.9,48.77 J15.2
  Bottom 0.203: v63.75,25.91 v66.29,25.91
SCL3  (via drill 0.38)
  Top 0.203: J16.4 89.91,11.96 J19.4 89.91,25.66 v89.66,25.91 | v87.12,25.91 87.12,27.18 83.73,30.57 R7.1 83.73,33.95 86.87,37.09 J18.4 86.89,41.66 86.89,48.77 J17.4 86.89,53.57 86.61,53.85 85.34,53.85 80.26,48.77 J20.2
  Bottom 0.203: v87.12,25.91 v89.66,25.91
SCL4  (via drill 0.38)
  Top 0.203: J21.4 113.28,11.96 J24.4 113.28,25.66 v113.03,25.91 | v110.49,25.91 110.49,27.18 107.1,30.57 R9.1 107.1,33.95 110.24,37.09 J23.4 110.26,41.66 110.26,48.77 J22.4 110.26,53.57 109.98,53.85 108.71,53.85 103.63,48.77 J25.2
  Bottom 0.203: v110.49,25.91 v113.03,25.91
SCL5  (via drill 0.38)
  Top 0.203: J26.4 19.81,63.27 J29.4 19.81,76.96 v19.56,77.22 | v17.02,77.22 17.02,78.49 13.63,81.88 R11.1 13.63,85.26 16.77,88.39 J28.4 16.79,92.97 16.79,100.08 J27.4 16.79,104.88 16.51,105.16 15.24,105.16 10.16,100.08 J30.2
  Bottom 0.203: v17.02,77.22 v19.56,77.22
SCL6  (via drill 0.38)
  Top 0.203: J31.4 43.18,63.27 J34.4 43.18,76.96 v42.93,77.22 | v40.39,77.22 40.39,78.49 37,81.88 R13.1 37,85.26 40.13,88.39 J33.4 40.16,92.97 40.16,100.08 J32.4 40.16,104.88 39.88,105.16 38.61,105.16 33.53,100.08 J35.2
  Bottom 0.203: v40.39,77.22 v42.93,77.22
SCL7  (via drill 0.38)
  Top 0.203: J36.4 66.55,63.27 J39.4 66.55,76.96 v66.29,77.22 | v63.75,77.22 63.75,78.49 60.36,81.88 R15.1 60.36,85.26 63.5,88.39 J38.4 63.52,92.97 63.52,100.08 J37.4 63.52,104.88 63.25,105.16 61.98,105.16 56.9,100.08 J40.2
  Bottom 0.203: v63.75,77.22 v66.29,77.22
SCL8  (via drill 0.38)
  Top 0.203: J41.4 89.91,63.27 J44.4 89.91,76.96 v89.66,77.22 | v87.12,77.22 87.12,78.49 83.73,81.88 R17.1 83.73,85.26 86.87,88.39 J43.4 86.89,92.97 86.89,100.08 J42.4 86.89,104.88 86.61,105.16 85.34,105.16 80.26,100.08 J45.2
  Bottom 0.203: v87.12,77.22 v89.66,77.22
SCL9  (via drill 0.38)
  Top 0.203: J46.4 113.28,63.27 J49.4 113.28,76.96 v113.03,77.22 | v110.49,77.22 110.49,78.49 107.1,81.88 R19.1 107.1,85.26 110.24,88.39 J48.4 110.26,92.97 110.26,100.08 J47.4 110.26,104.88 109.98,105.16 108.71,105.16 103.63,100.08 J50.2
  Bottom 0.203: v110.49,77.22 v113.03,77.22
SCL10  (via drill 0.38)
  Top 0.203: J51.4 19.81,114.58 J54.4 19.81,128.27 v19.56,128.52 | v17.02,128.52 17.02,129.79 13.63,133.18 R21.1 13.63,136.56 16.77,139.7 J53.4 16.79,144.28 16.79,151.38 J52.4 16.79,156.19 16.51,156.46 15.24,156.46 10.16,151.38 J55.2
  Bottom 0.203: v17.02,128.52 v19.56,128.52
SCL11  (via drill 0.38)
  Top 0.203: J56.4 43.18,114.58 J59.4 43.18,128.27 v42.93,128.52 | v40.39,128.52 40.39,129.79 37,133.18 R23.1 37,136.56 40.13,139.7 J58.4 40.16,144.28 40.16,151.38 J57.4 40.16,156.19 39.88,156.46 38.61,156.46 33.53,151.38 J60.2
  Bottom 0.203: v40.39,128.52 v42.93,128.52
SCL12  (via drill 0.38)
  Top 0.203: J61.4 66.55,114.58 J64.4 66.55,128.27 v66.29,128.52 | v63.75,128.52 63.75,129.79 60.36,133.18 R25.1 60.36,136.56 63.5,139.7 J63.4 63.52,144.28 63.52,151.38 J62.4 63.52,156.19 63.25,156.46 61.98,156.46 56.9,151.38 J65.2
  Bottom 0.203: v63.75,128.52 v66.29,128.52
SCL13  (via drill 0.38)
  Top 0.203: J66.4 89.91,114.58 J69.4 89.91,128.27 v89.66,128.52 | v87.12,128.52 87.12,129.79 83.73,133.18 R27.1 83.73,136.56 86.87,139.7 J68.4 86.89,144.28 86.89,151.38 J67.4 86.89,156.19 86.61,156.46 85.34,156.46 80.26,151.38 J70.2
  Bottom 0.203: v87.12,128.52 v89.66,128.52
SCL14  (via drill 0.38)
  Top 0.203: J71.4 113.28,114.58 J74.4 113.28,128.27 v113.03,128.52 | v110.49,128.52 110.49,129.79 107.1,133.18 R29.1 107.1,136.56 110.24,139.7 J73.4 110.26,144.28 110.26,151.38 J72.4 110.26,156.19 109.98,156.46 108.71,156.46 103.63,151.38 J75.2
  Bottom 0.203: v110.49,128.52 v113.03,128.52
SDA  (via drill 0.38)
  Top 0.203: J1.3 18.79,22.85 J4.3 18.81,26.43 22.95,30.57 R2.1 22.95,36.49 22.1,37.34 v19.56,37.34 | J5.1 11.94,51.31 14.99,54.36 17.27,54.36 17.79,53.84 J2.3 17.77,52.56 J3.3 17.77,37.35 v17.78,37.34
  Bottom 0.203: v17.78,37.34 v19.56,37.34
SDA1  (via drill 0.38)
  Top 0.203: J6.3 42.16,22.85 J9.3 42.18,26.43 46.32,30.57 R4.1 46.32,36.49 45.47,37.34 v42.93,37.34 | J10.1 35.31,51.31 38.35,54.36 40.64,54.36 41.16,53.84 J7.3 41.13,52.56 J8.3 41.13,37.35 v41.15,37.34
  Bottom 0.203: v41.15,37.34 v42.93,37.34
SDA2  (via drill 0.38)
  Top 0.203: J11.3 65.52,22.85 J14.3 65.55,26.43 69.68,30.57 R6.1 69.68,36.49 68.83,37.34 v66.29,37.34 | J15.1 58.67,51.31 61.72,54.36 64.01,54.36 64.52,53.84 J12.3 64.5,52.56 J13.3 64.5,37.35 v64.52,37.34
  Bottom 0.203: v64.52,37.34 v66.29,37.34
SDA3  (via drill 0.38)
  Top 0.203: J16.3 88.89,22.85 J19.3 88.91,26.43 93.05,30.57 R8.1 93.05,36.49 92.2,37.34 v89.66,37.34 | J20.1 82.04,51.31 85.09,54.36 87.38,54.36 87.89,53.84 J17.3 87.87,52.56 J18.3 87.87,37.35 v87.88,37.34
  Bottom 0.203: v87.88,37.34 v89.66,37.34
SDA4  (via drill 0.38)
  Top 0.203: J21.3 112.26,22.85 J24.3 112.28,26.43 116.42,30.57 R10.1 116.42,36.49 115.57,37.34 v113.03,37.34 | J25.1 105.41,51.31 108.46,54.36 110.74,54.36 111.26,53.84 J22.3 111.24,52.56 J23.3 111.24,37.35 v111.25,37.34
  Bottom 0.203: v111.25,37.34 v113.03,37.34
SDA5  (via drill 0.38)
  Top 0.203: J26.3 18.79,74.16 J29.3 18.81,77.74 22.95,81.88 R12.1 22.95,87.8 22.1,88.65 v19.56,88.65 | J30.1 11.94,102.62 14.99,105.66 17.27,105.66 17.79,105.15 J27.3 17.77,103.86 J28.3 17.77,88.66 v17.78,88.65
  Bottom 0.203: v17.78,88.65 v19.56,88.65
SDA6  (via drill 0.38)
  Top 0.203: J31.3 42.16,74.16 J34.3 42.18,77.74 46.32,81.88 R14.1 46.32,87.8 45.47,88.65 v42.93,88.65 | J35.1 35.31,102.62 38.35,105.66 40.64,105.66 41.16,105.15 J32.3 41.13,103.86 J33.3 41.13,88.66 v41.15,88.65
  Bottom 0.203: v41.15,88.65 v42.93,88.65
SDA7  (via drill 0.38)
  Top 0.203: J36.3 65.52,74.16 J39.3 65.55,77.74 69.68,81.88 R16.1 69.68,87.8 68.83,88.65 v66.29,88.65 | J40.1 58.67,102.62 61.72,105.66 64.01,105.66 64.52,105.15 J37.3 64.5,103.86 J38.3 64.5,88.66 v64.52,88.65
  Bottom 0.203: v64.52,88.65 v66.29,88.65
SDA8  (via drill 0.38)
  Top 0.203: J41.3 88.89,74.16 J44.3 88.91,77.74 93.05,81.88 R18.1 93.05,87.8 92.2,88.65 v89.66,88.65 | J45.1 82.04,102.62 85.09,105.66 87.38,105.66 87.89,105.15 J42.3 87.87,103.86 J43.3 87.87,88.66 v87.88,88.65
  Bottom 0.203: v87.88,88.65 v89.66,88.65
SDA9  (via drill 0.38)
  Top 0.203: J46.3 112.26,74.16 J49.3 112.28,77.74 116.42,81.88 R20.1 116.42,87.8 115.57,88.65 v113.03,88.65 | J50.1 105.41,102.62 108.46,105.66 110.74,105.66 111.26,105.15 J47.3 111.24,103.86 J48.3 111.24,88.66 v111.25,88.65
  Bottom 0.203: v111.25,88.65 v113.03,88.65
SDA10  (via drill 0.38)
  Top 0.203: J51.3 18.79,125.47 J54.3 18.81,129.05 22.95,133.18 R22.1 22.95,139.1 22.1,139.95 v19.56,139.95 | J55.1 11.94,153.92 14.99,156.97 17.27,156.97 17.79,156.46 J52.3 17.77,155.17 J53.3 17.77,139.97 v17.78,139.95
  Bottom 0.203: v17.78,139.95 v19.56,139.95
SDA11  (via drill 0.38)
  Top 0.203: J56.3 42.16,125.47 J59.3 42.18,129.05 46.32,133.18 R24.1 46.32,139.1 45.47,139.95 v42.93,139.95 | J60.1 35.31,153.92 38.35,156.97 40.64,156.97 41.16,156.46 J57.3 41.13,155.17 J58.3 41.13,139.97 v41.15,139.95
  Bottom 0.203: v41.15,139.95 v42.93,139.95
SDA12  (via drill 0.38)
  Top 0.203: J61.3 65.52,125.47 J64.3 65.55,129.05 69.68,133.18 R26.1 69.68,139.1 68.83,139.95 v66.29,139.95 | J65.1 58.67,153.92 61.72,156.97 64.01,156.97 64.52,156.46 J62.3 64.5,155.17 J63.3 64.5,139.97 v64.52,139.95
  Bottom 0.203: v64.52,139.95 v66.29,139.95
SDA13  (via drill 0.38)
  Top 0.203: J66.3 88.89,125.47 J69.3 88.91,129.05 93.05,133.18 R28.1 93.05,139.1 92.2,139.95 v89.66,139.95 | J70.1 82.04,153.92 85.09,156.97 87.38,156.97 87.89,156.46 J67.3 87.87,155.17 J68.3 87.87,139.97 v87.88,139.95
  Bottom 0.203: v87.88,139.95 v89.66,139.95
SDA14  (via drill 0.38)
  Top 0.203: J71.3 112.26,125.47 J74.3 112.28,129.05 116.42,133.18 R30.1 116.42,139.1 115.57,139.95 v113.03,139.95 | J75.1 105.41,153.92 108.46,156.97 110.74,156.97 111.26,156.46 J72.3 111.24,155.17 J73.3 v111.24,139.97 v111.25,139.95
  Bottom 0.203: v111.25,139.95 v113.03,139.95

## Text on the board
Bottom: v10 | v10 | v10 | v10 | v10 | v10 | v10 | v10 | v10 | v10 | v10 | v10 | v10 | v10 | v10
Milling: v-score | v-score | v-score | v-score | v-score | v-score | v-score | v-score | v-score | v-score